# Altium PCB PlataMagnitometra.PcbDoc
Units mm, origin at the board's own origin, x right, y up, seen from the top; angles counter-clockwise.
Board outline 60 x 50 mm, 2 copper layers (Top Layer, Bottom Layer); 53 components, 38 nets, 243 pads, 25 vias.
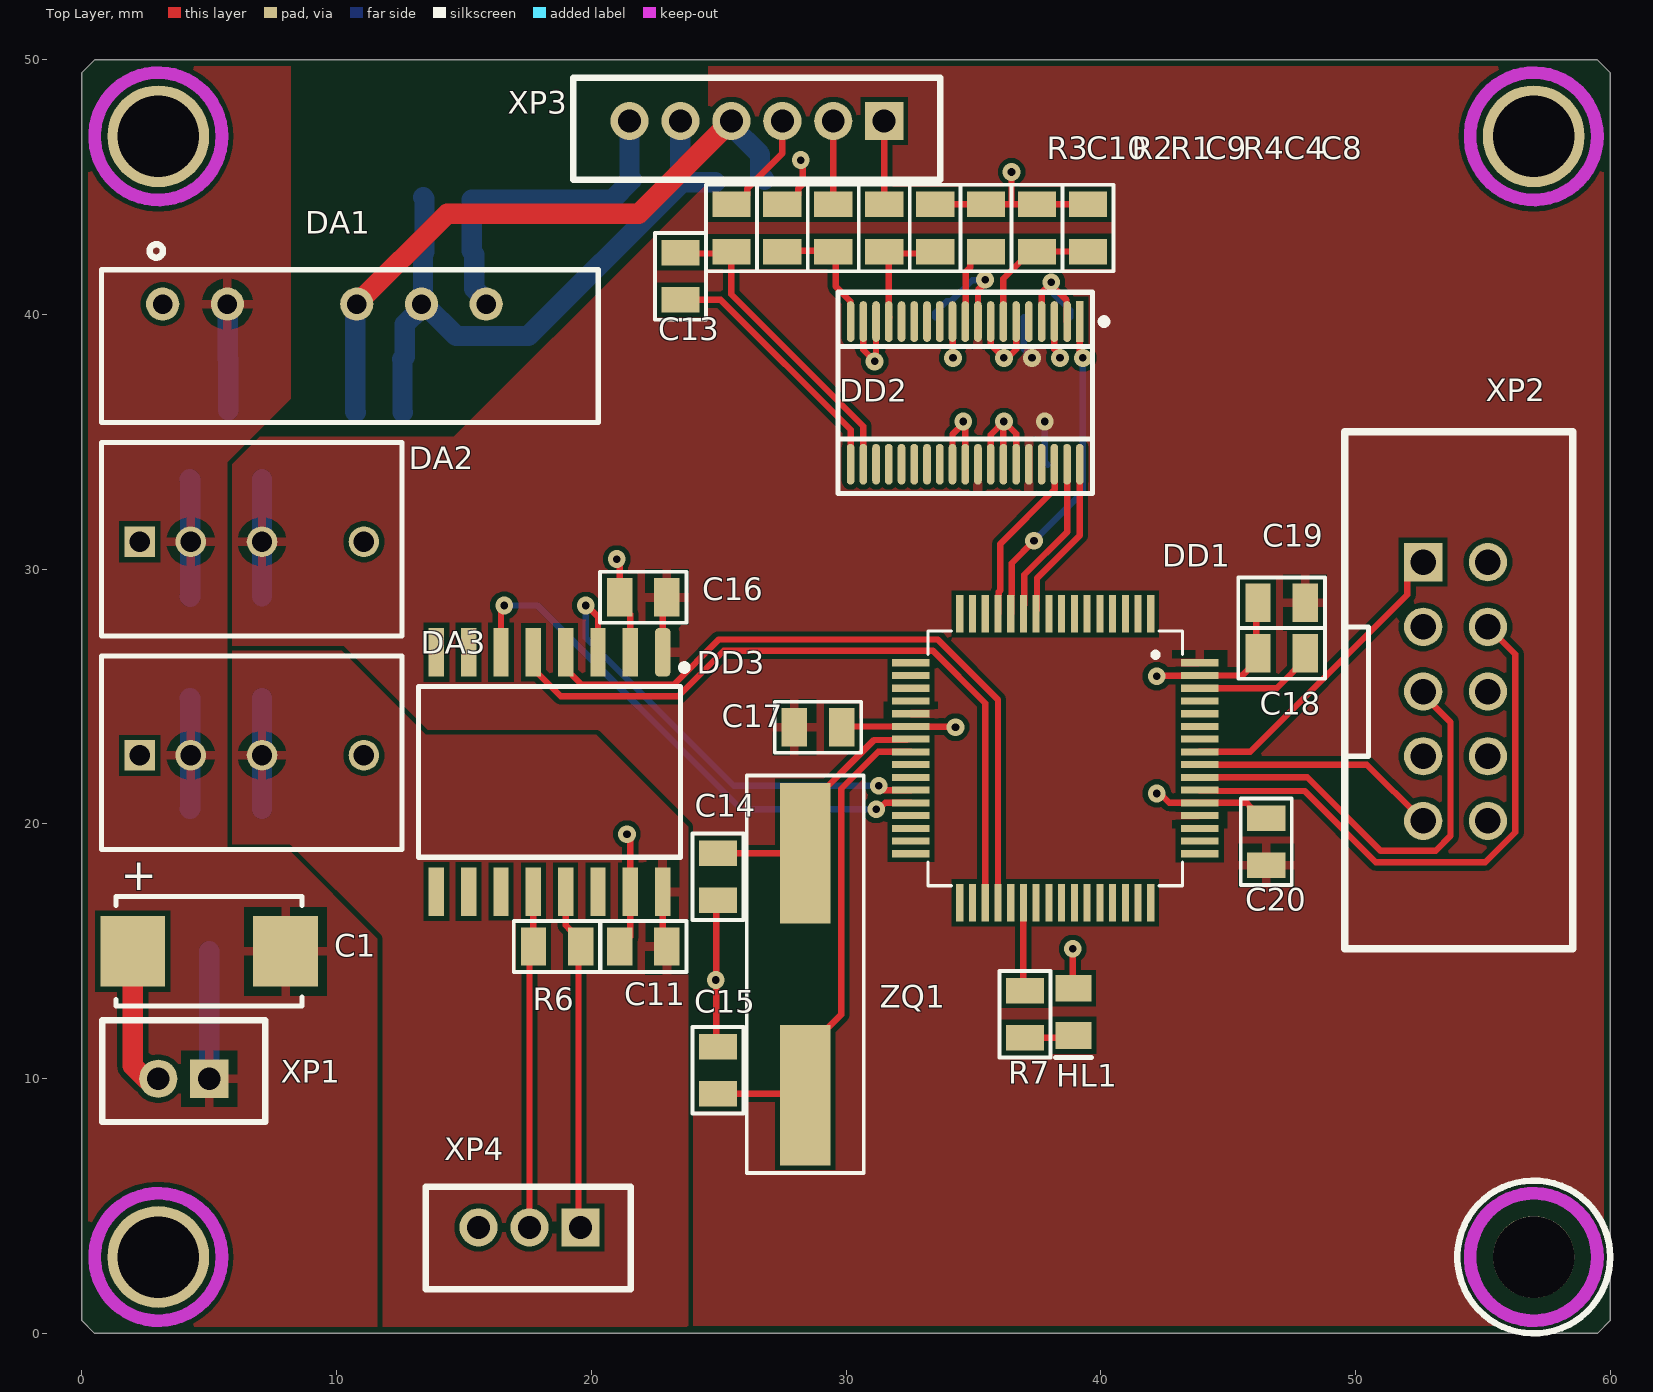
[diagram p0: Top Layer view]
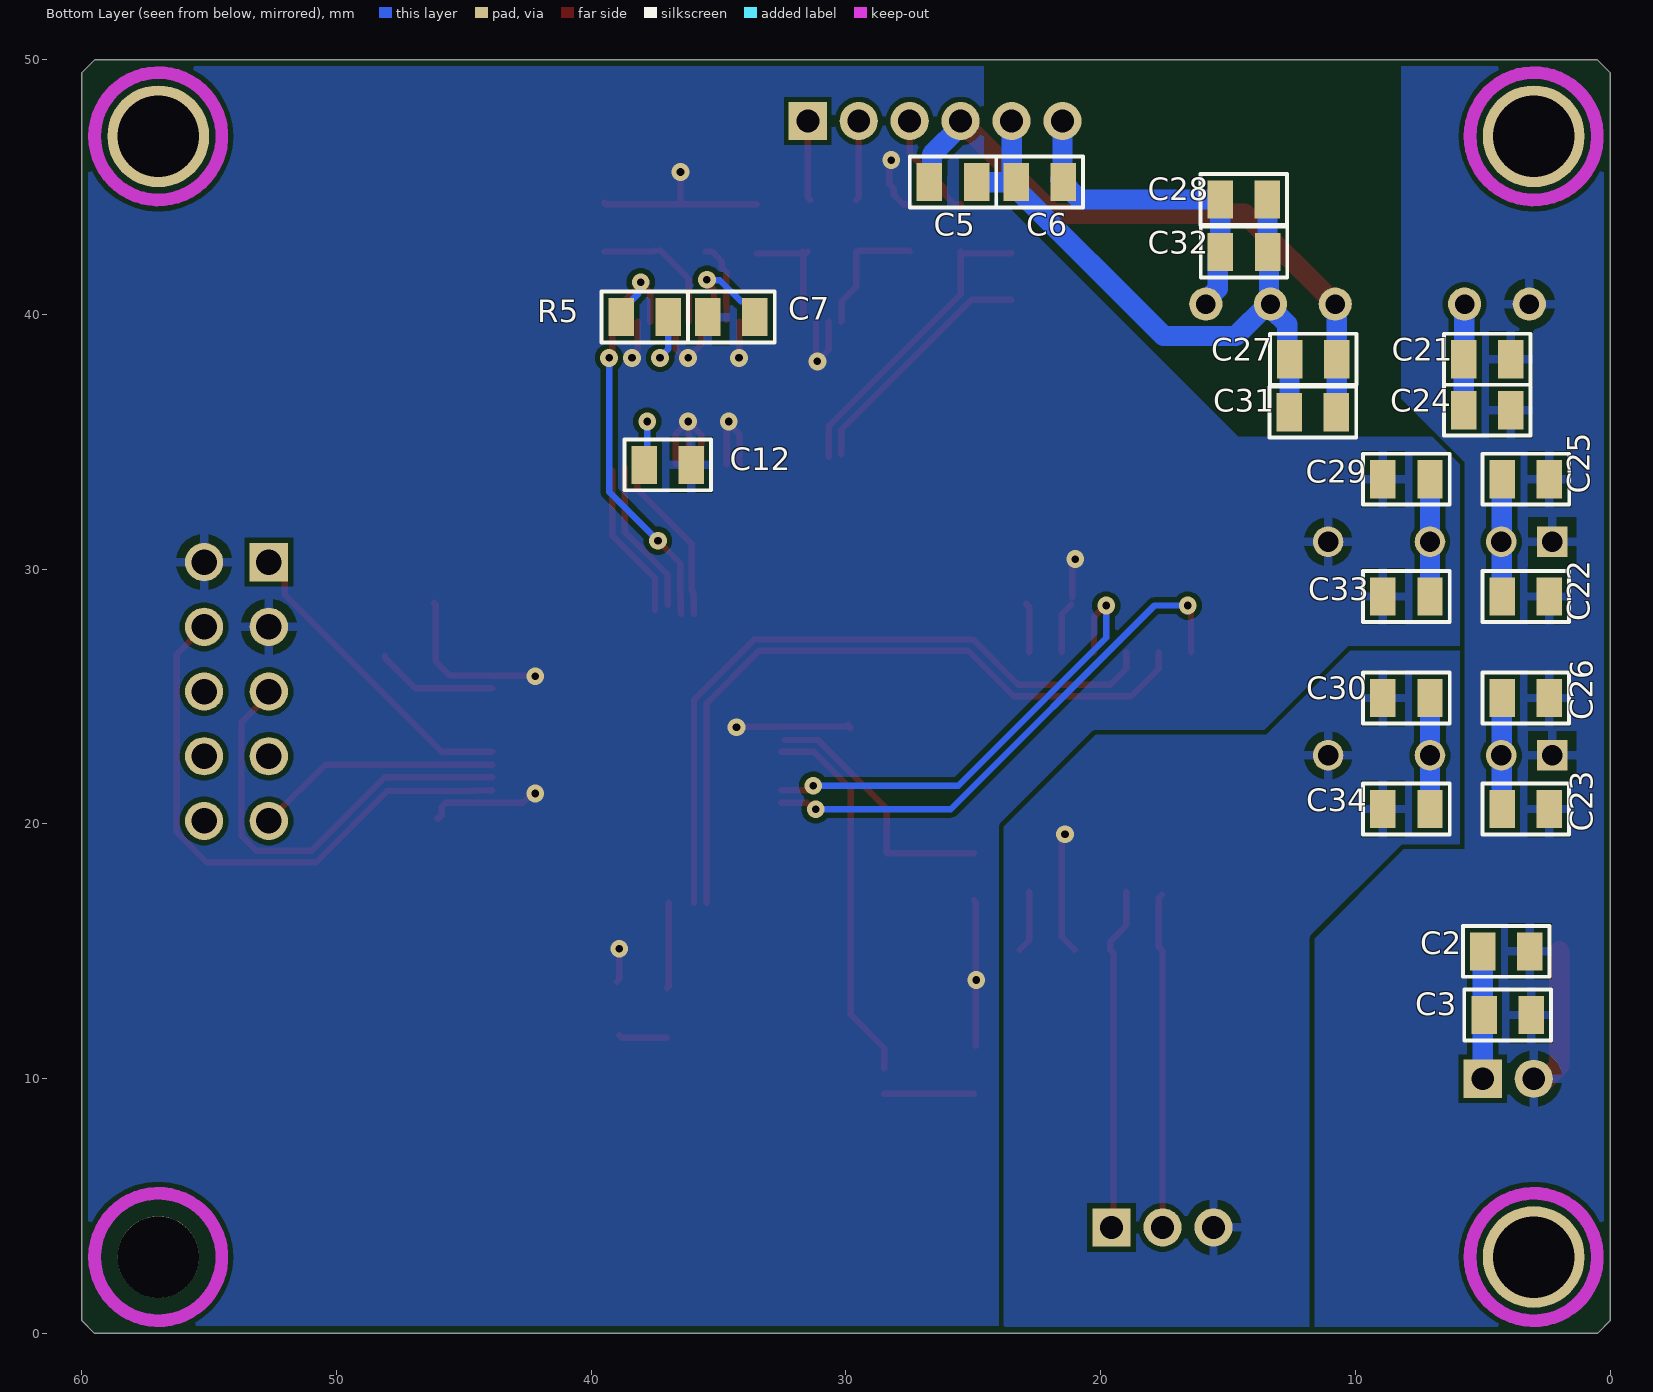
[diagram p1: Bottom Layer view, seen from below]
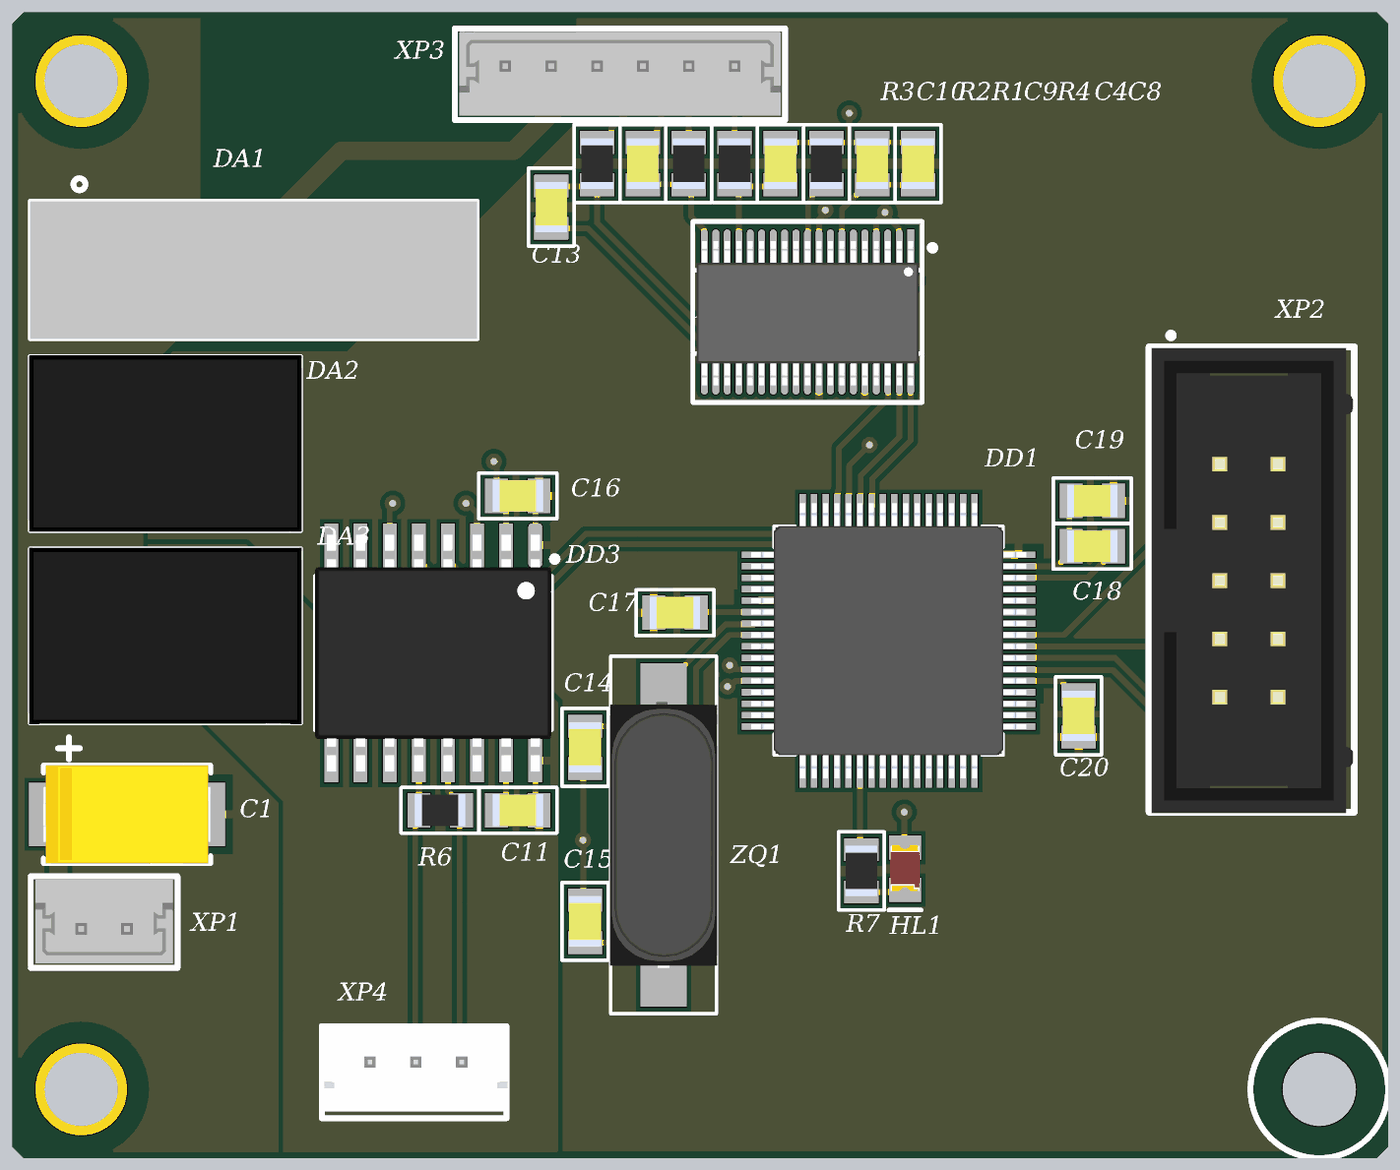
[diagram p2: 3D render of the assembled board from above, using the file's embedded part models]
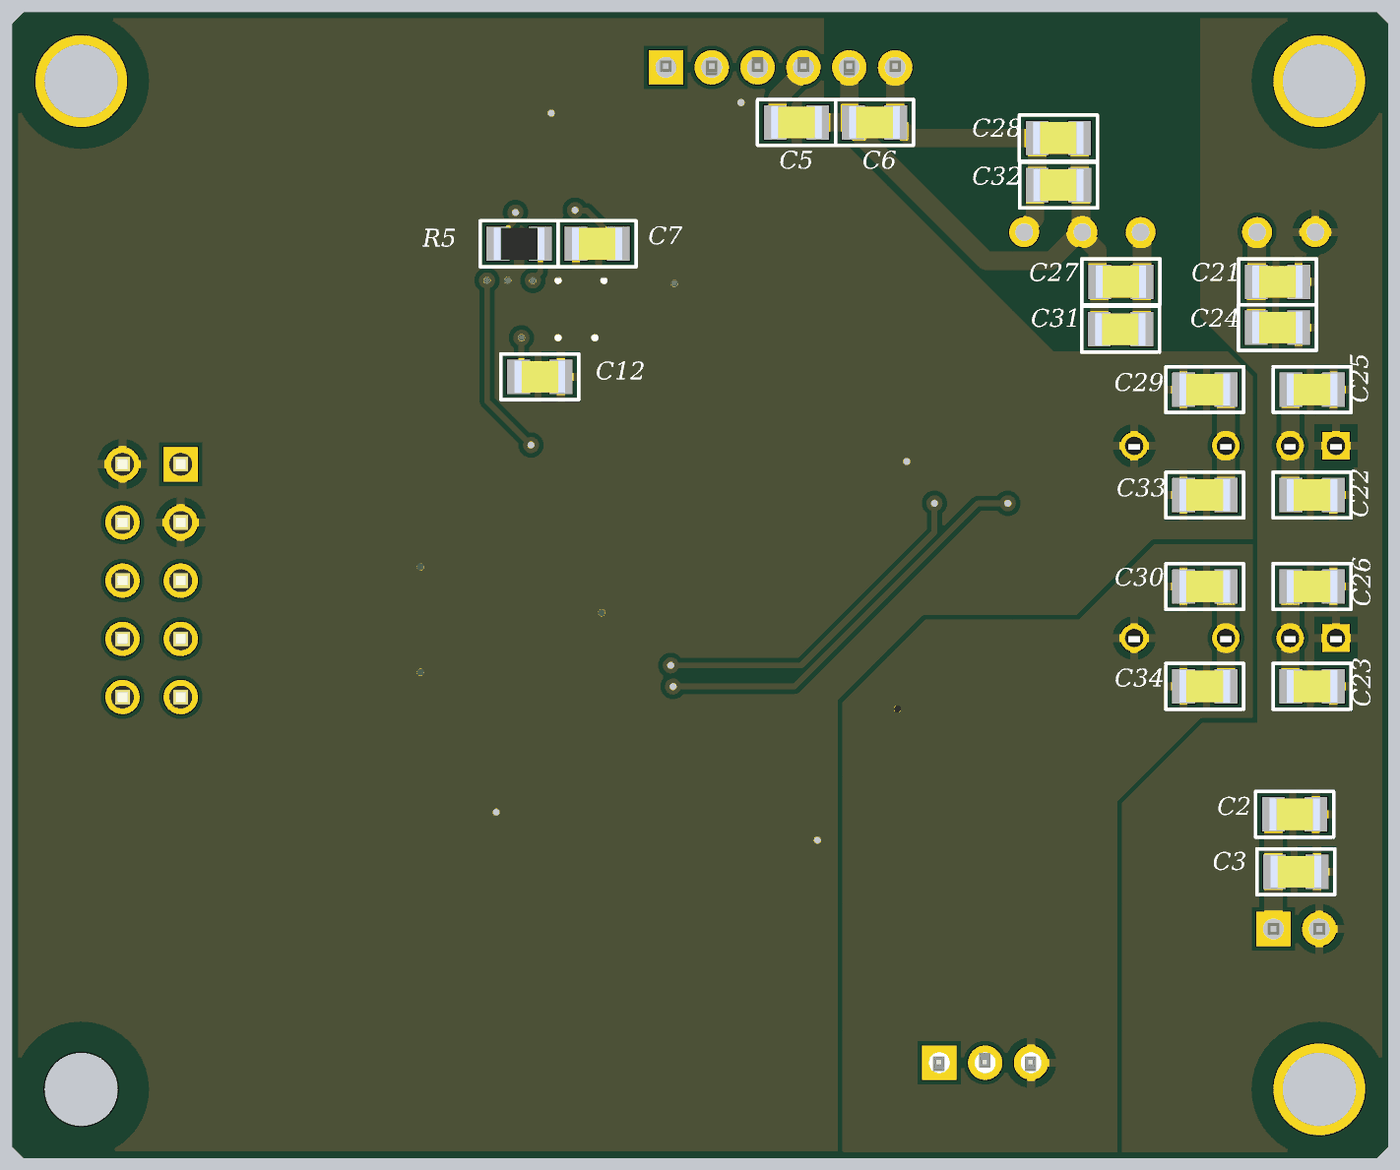
[diagram p3: 3D render of the assembled board from below, using the file's embedded part models]

## Layer stack, top to bottom
Top Solder: solder mask 0.0102, Solder Resist, Dk 3.5
Top Layer: signal copper 0.0356
Dielectric 1: dielectric 0.32, FR-4, Dk 4.8
Bottom Layer: signal copper 0.0356
Bottom Solder: solder mask 0.0102, Solder Resist, Dk 3.5

## Board outline
0,0.5 0,49.5 0.5,50 59.5,50 60,49.5 60,0.5 59.5,0 0.5,0

## Design rules (kind name [scope] priority, off if disabled: settings)
AcuteAngle [All] p1: minimum=3.50000000000000E+0001 checktracksonly=FALSE
BoardOutlineClearance "BoardOutlineClearance 1" [All] p1: gap=0.25 ignorepadtopadclearanceinfootprint=FALSE except(0: Arc-SplitContinuation Track-SplitContinuation SMDPad-SplitContinuation THPad-SplitContinuation Via-SplitContinuation Fill-SplitContinuation Poly-SplitContinuation Region-SplitContinuation Text-SplitContinuation) // Milling
BoardOutlineClearance "BoardOutlineClearance 2" [All] p2: gap=0.4 ignorepadtopadclearanceinfootprint=FALSE except(0: Arc-SplitContinuation Track-SplitContinuation SMDPad-SplitContinuation THPad-SplitContinuation Via-SplitContinuation Fill-SplitContinuation Poly-SplitContinuation Region-SplitContinuation Text-SplitContinuation) // V-Cut
Clearance "Clearance-1 1 Oz" [All] p1: gap=0.2 ignorepadtopadclearanceinfootprint=FALSE except(0.25: Arc-Hole Track-Hole SMDPad-Hole THPad-Hole Via-Hole Fill-Hole Poly-Hole Region-Hole Text-Hole) // Standart
Clearance "Clearance-2 1 Oz" [All] p2: gap=0.15 ignorepadtopadclearanceinfootprint=FALSE except(0.2: Arc-Fill Arc-Poly Track-Fill Track-Poly SMDPad-Fill SMDPad-Poly THPad-Fill THPad-Poly Via-Fill Via-Poly Fill-Fill Fill-Poly Poly-Poly; 0.25: Arc-Hole Track-Hole SMDPad-Hole THPad-Hole Via-Hole Fill-Hole Poly-Hole Region-Hole Text-Hole) // Advance
DiffPairsRouting "DiffPairsRouting 1 Oz" [All] p1: maxlimit=0.254 minlimit=0.2 mostfreqgap=0.254 toplayer_minwidth=0.2 toplayer_maxwidth=0.381 toplayer_prefwidth=0.381 bottomlayer_minwidth=0.2 bottomlayer_maxwidth=0.381 bottomlayer_prefwidth=0.381 maxuncoupledlength=12.7
DiffPairsRouting "DiffPairsRouting 1/2 Oz" [All] p2: maxlimit=0.254 minlimit=0.1 mostfreqgap=0.254 toplayer_minwidth=0.1 toplayer_maxwidth=0.381 toplayer_prefwidth=0.381 bottomlayer_minwidth=0.1 bottomlayer_maxwidth=0.381 bottomlayer_prefwidth=0.381 maxuncoupledlength=12.7
HoleSize "Minimum HoleSize" [IsPad] p1: absolutevalues=TRUE maxlimit=5.9 minlimit=0.6 maxpercent=80.000 minpercent=20.000
HoleSize "Minimum HoleSize VIA 1" [IsVia] p2: absolutevalues=TRUE maxlimit=5.9 minlimit=0.3 maxpercent=80.000 minpercent=20.000 // Standart
HoleSize "Minimum HoleSize VIA 2" [IsVia] p3: absolutevalues=TRUE maxlimit=5.9 minlimit=0.2 maxpercent=80.000 minpercent=20.000 // Advance
HoleToHoleClearance Hole2HoleClearance [All] p1: gap=0.25 allowstackedmicrovias=FALSE
MinimumAnnularRing "Minimum AR VIA Standart" [IsVia] p1: minimumring=0.15
MinimumAnnularRing "Minimum AR PAD Standart" [IsPAD] p2: minimumring=0.2
MinimumAnnularRing "Minimum AR VIA Advance" [IsVia] p3: minimumring=0.1
MinimumAnnularRing "Minimum AR PAD Advance" [IsPAD] p4: minimumring=0.15
MinimumSolderMaskSliver "SolderMask Bridge Standart" [All] p1: minsoldermaskwidth=0.1 // All Masks
MinimumSolderMaskSliver "SolderMask Bridge Advance" [All] p2: minsoldermaskwidth=0.1 // Mask LDI
PlaneClearance "PlaneClearance 3 Oz" [All] p1: clearance=0.35
PlaneClearance "PlaneClearance 2 Oz" [All] p2: clearance=0.3
PlaneClearance "PlaneClearance 1 Oz" [All] p3: clearance=0.2
PlaneClearance "PlaneClearance-1 1/2 Oz" [All] p4: clearance=0.2 // Standart
PlaneClearance "PlaneClearance-2 1/2 Oz" [All] p5: clearance=0.15 // Advance
PlaneConnect "TermalConnect 3 Oz" [All] p1: planeconnectstyle=Relief reliefexpansion=0.2 reliefentries=4 reliefconductorwidth=0.35 reliefairgap=0.35 // Standart
PlaneConnect "TermalConnect 2 Oz" [All] p2: planeconnectstyle=Relief reliefexpansion=0.2 reliefentries=4 reliefconductorwidth=0.3 reliefairgap=0.3 // Standart
PlaneConnect "TermalConnect-1 1 Oz" [All] p3: planeconnectstyle=Relief reliefexpansion=0.2 reliefentries=4 reliefconductorwidth=0.2 reliefairgap=0.2 // Standart
PlaneConnect "TermalConnect-2 1 Oz" [All] p4: pad.planeconnectstyle=Relief pad.reliefexpansion=0.15 pad.reliefentries=4 pad.reliefconductorwidth=0.2 pad.reliefairgap=0.2 via.planeconnectstyle=Direct via.reliefexpansion=0.15 via.reliefentries=4 via.reliefconductorwidth=0.15 via.reliefairgap=0.15 // Advance
PlaneConnect "TermalConnect-1 1/2 Oz" [All] p5: planeconnectstyle=Relief reliefexpansion=0.2 reliefentries=4 reliefconductorwidth=0.2 reliefairgap=0.2 // Standart
PlaneConnect "TermalConnect-2 1/2 Oz" [All] p6: pad.planeconnectstyle=Relief pad.reliefexpansion=0.15 pad.reliefentries=4 pad.reliefconductorwidth=0.15 pad.reliefairgap=0.15 via.planeconnectstyle=Direct via.reliefexpansion=0.15 via.reliefentries=4 via.reliefconductorwidth=0.15 via.reliefairgap=0.15 // Advance
PolygonConnect "PolygonConnect 3 Oz" [All] p1: thpad.connectstyle=Relief thpad.reliefconductorwidth=0.35 thpad.reliefentries=4 thpad.polygonreliefangle="90 Angle" thpad.airgapwidth=0.35 smdpad.connectstyle=Relief smdpad.reliefconductorwidth=0.35 smdpad.reliefentries=4 smdpad.polygonreliefangle="90 Angle" smdpad.airgapwidth=0.35 via.connectstyle=Direct via.reliefconductorwidth=0.254 via.reliefentries=4 via.polygonreliefangle="90 Angle" via.airgapwidth=0.254
PolygonConnect "PolygonConnect 2 Oz" [All] p2: thpad.connectstyle=Relief thpad.reliefconductorwidth=0.3 thpad.reliefentries=4 thpad.polygonreliefangle="90 Angle" thpad.airgapwidth=0.3 smdpad.connectstyle=Relief smdpad.reliefconductorwidth=0.3 smdpad.reliefentries=4 smdpad.polygonreliefangle="90 Angle" smdpad.airgapwidth=0.3 via.connectstyle=Direct via.reliefconductorwidth=0.254 via.reliefentries=4 via.polygonreliefangle="90 Angle" via.airgapwidth=0.254
PolygonConnect "PolygonConnect-1 1 Oz" [All] p3: thpad.connectstyle=Relief thpad.reliefconductorwidth=0.2 thpad.reliefentries=4 thpad.polygonreliefangle="90 Angle" thpad.airgapwidth=0.2 smdpad.connectstyle=Relief smdpad.reliefconductorwidth=0.2 smdpad.reliefentries=4 smdpad.polygonreliefangle="90 Angle" smdpad.airgapwidth=0.2 via.connectstyle=Direct via.reliefconductorwidth=0.254 via.reliefentries=4 via.polygonreliefangle="90 Angle" via.airgapwidth=0.254 // Standart
PolygonConnect "PolygonConnect-2 1 Oz" [All] p4: thpad.connectstyle=Relief thpad.reliefconductorwidth=0.15 thpad.reliefentries=4 thpad.polygonreliefangle="90 Angle" thpad.airgapwidth=0.15 smdpad.connectstyle=Relief smdpad.reliefconductorwidth=0.15 smdpad.reliefentries=4 smdpad.polygonreliefangle="90 Angle" smdpad.airgapwidth=0.15 via.connectstyle=Direct via.reliefconductorwidth=0.254 via.reliefentries=4 via.polygonreliefangle="90 Angle" via.airgapwidth=0.254 // Advance
PolygonConnect "PolygonConnect-1 1/2 Oz" [All] p5: thpad.connectstyle=Relief thpad.reliefconductorwidth=0.15 thpad.reliefentries=4 thpad.polygonreliefangle="90 Angle" thpad.airgapwidth=0.2 smdpad.connectstyle=Relief smdpad.reliefconductorwidth=0.2 smdpad.reliefentries=4 smdpad.polygonreliefangle="90 Angle" smdpad.airgapwidth=0.2 via.connectstyle=Direct via.reliefconductorwidth=0.254 via.reliefentries=4 via.polygonreliefangle="90 Angle" via.airgapwidth=0.254 // Standart
PolygonConnect "PolygonConnect-2 1/2 Oz" [All] p6: thpad.connectstyle=Relief thpad.reliefconductorwidth=0.125 thpad.reliefentries=4 thpad.polygonreliefangle="90 Angle" thpad.airgapwidth=0.15 smdpad.connectstyle=Relief smdpad.reliefconductorwidth=0.125 smdpad.reliefentries=4 smdpad.polygonreliefangle="90 Angle" smdpad.airgapwidth=0.15 via.connectstyle=Direct via.reliefconductorwidth=0.254 via.reliefentries=4 via.polygonreliefangle="90 Angle" via.airgapwidth=0.254 // Advance
RoutingCorners [All] p1 off: cornerstyle=45-Degree minsetback=2.54 maxsetback=2.54
RoutingVias [All] p1: holewidth=0.3 width=0.6 viastyle="Through Hole" minholewidth=0.2 minwidth=0.4 maxholewidth=5.9 maxwidth=6.4
SilkToSilkClearance Silk2SilkClearance [All] p1 off: silktosilkclearance=0.15
SilkToSolderMaskClearance Silk2SolderMaskClearance [IsPad] p1 off: minsilkscreentomaskgap=0.15 clearancetoexposedcopper=TRUE
SolderMaskExpansion SolderMaskExpansion-1 [All] p1: expansion=0.05 istentingtop=FALSE // Standart
SolderMaskExpansion "SolderMaskExpansion LDI" [All] p2: expansion=0.025 istentingtop=FALSE // Advance
UnRoutedNet [All] p1: checkbadconnections=TRUE
Width "Width 1 Oz" [All] p1: maxlimit=10 minlimit=0.15 preferedwidth=0.2 checkconnectedcopper=TRUE
Width "Width 1/2 Oz" [All] p2: maxlimit=10 minlimit=0.1 preferedwidth=0.125 checkconnectedcopper=TRUE
20 further rules are at their usual default settings.

## Components (designator, comment, footprint, x,y, rotation, side; value= is the part's Value field where it differs from the comment)
C1 "Конденсатор электрол. 10 В 100 мкФ Ом, ±10%, TANT CAP D" "TANT CAP D" 4.998,15 r0 top value="100 мкФ"
C2 "Конденсатор керамич. 50 В 0.1 мкФ Ом, ±10%, X7R SMD 0805" CAP0805 4.075,15 r180 bottom value="0.1 мкФ"
C3 "Конденсатор керамич. 50 В 10 мкФ Ом, ±10%, X5R SMD 0805" CAP0805 4.025,12.5 r180 bottom value="10 мкФ"
C4 "Конденсатор керамич. 50 В 0.1 мкФ Ом, ±10%, X7R SMD 0805" CAP0805 37.5,43.4 r90 top value="0.1 мкФ"
C5 "Конденсатор керамич. 50 В 10 мкФ Ом, ±10%, X5R SMD 0805" CAP0805 25.8,45.2 r180 bottom value="10 мкФ"
C6 "Конденсатор керамич. 50 В 10 мкФ Ом, ±10%, X5R SMD 0805" CAP0805 22.4,45.2 r180 bottom value="10 мкФ"
C7 "Конденсатор керамич. 50 В 0.1 мкФ Ом, ±10%, X7R SMD 0805" CAP0805 34.5,39.9 r0 bottom value="0.1 мкФ"
C8 "Конденсатор керамич. 50 В 0.1 мкФ Ом, ±10%, X7R SMD 0805" CAP0805 39.5,43.4 r90 top value="0.1 мкФ"
C9 "Конденсатор керамич. 50 В 0.1 мкФ Ом, ±10%, X7R SMD 0805" CAP0805 33.5,43.4 r270 top value="0.1 мкФ"
C10 "Конденсатор керамич. 50 В 0.1 мкФ Ом, ±10%, X7R SMD 0805" CAP0805 27.5,43.4 r270 top value="0.1 мкФ"
C11 "Конденсатор керамич. 50 В 0.1 мкФ Ом, ±10%, X7R SMD 0805" CAP0805 22.042,15.186 r0 top value="0.1 мкФ"
C12 "Конденсатор керамич. 50 В 0.1 мкФ Ом, ±10%, X7R SMD 0805" CAP0805 37,34.1 r0 bottom value="0.1 мкФ"
C13 "Конденсатор керамич. 50 В 0.1 мкФ Ом, ±10%, X7R SMD 0805" CAP0805 23.5,41.5 r90 top value="0.1 мкФ"
C14 "Конденсатор керамич. 50 В 0.3 пФ Ом, +0.25pF, X5R SMD 0805" CAP0805 24.975,17.925 r270 top value="0.3 пФ"
C15 "Конденсатор керамич. 50 В 0.3 пФ Ом, +0.25pF, X5R SMD 0805" CAP0805 24.975,10.331 r90 top value="0.3 пФ"
C16 "Конденсатор керамич. 50 В 0.1 мкФ Ом, ±10%, X7R SMD 0805" CAP0805 22.042,28.902 r180 top value="0.1 мкФ"
C17 "Конденсатор керамич. 50 В 0.1 мкФ Ом, ±10%, X7R SMD 0805" CAP0805 28.9,23.8 r180 top value="0.1 мкФ"
C18 "Конденсатор керамич. 50 В 0.1 мкФ Ом, ±10%, X7R SMD 0805" CAP0805 47.1,26.7 r0 top value="0.1 мкФ"
C19 "Конденсатор керамич. 50 В 0.1 мкФ Ом, ±10%, X7R SMD 0805" CAP0805 47.1,28.684 r180 top value="0.1 мкФ"
C20 "Конденсатор керамич. 50 В 0.1 мкФ Ом, ±10%, X7R SMD 0805" CAP0805 46.5,19.3 r270 top value="0.1 мкФ"
C21 "Конденсатор керамич. 50 В 0.1 мкФ Ом, ±10%, X7R SMD 0805" CAP0805 4.821,38.245 r180 bottom value="0.1 мкФ"
C22 "Конденсатор керамич. 50 В 0.1 мкФ Ом, ±10%, X7R SMD 0805" CAP0805 3.316,28.933 r180 bottom value="0.1 мкФ"
C23 "Конденсатор керамич. 50 В 0.1 мкФ Ом, ±10%, X7R SMD 0805" CAP0805 3.316,20.588 r180 bottom value="0.1 мкФ"
C24 "Конденсатор керамич. 50 В 10 мкФ Ом, ±10%, X5R SMD 0805" CAP0805 4.828,36.246 r180 bottom value="10 мкФ"
C25 "Конденсатор керамич. 50 В 10 мкФ Ом, ±10%, X5R SMD 0805" CAP0805 3.309,33.538 r180 bottom value="10 мкФ"
C26 "Конденсатор керамич. 50 В 10 мкФ Ом, ±10%, X5R SMD 0805" CAP0805 3.316,24.946 r180 bottom value="10 мкФ"
C27 "Конденсатор керамич. 50 В 0.1 мкФ Ом, ±10%, X7R SMD 0805" CAP0805 11.655,38.245 r0 bottom value="0.1 мкФ"
C28 "Конденсатор керамич. 50 В 0.1 мкФ Ом, ±10%, X7R SMD 0805" CAP0805 14.383,44.517 r0 bottom value="0.1 мкФ"
C29 "Конденсатор керамич. 50 В 0.1 мкФ Ом, ±10%, X7R SMD 0805" CAP0805 7.997,33.538 r0 bottom value="0.1 мкФ"
C30 "Конденсатор керамич. 50 В 0.1 мкФ Ом, ±10%, X7R SMD 0805" CAP0805 7.997,24.946 r0 bottom value="0.1 мкФ"
C31 "Конденсатор керамич. 50 В 10 мкФ Ом, ±10%, X5R SMD 0805" CAP0805 11.67,36.168 r0 bottom value="10 мкФ"
C32 "Конденсатор керамич. 50 В 10 мкФ Ом, ±10%, X5R SMD 0805" CAP0805 14.375,42.459 r0 bottom value="10 мкФ"
C33 "Конденсатор керамич. 50 В 10 мкФ Ом, ±10%, X5R SMD 0805" CAP0805 7.997,28.933 r0 bottom value="10 мкФ"
C34 "Конденсатор керамич. 50 В 10 мкФ Ом, ±10%, X5R SMD 0805" CAP0805 7.997,20.588 r0 bottom value="10 мкФ"
DA1 "DC/DC, 15Вт, Uвх: 18-36В, Uвых: 15ВDC, Iвых: 500мА" TBA12411E 3.173,40.41 r0 top
DA2 "DC/DC 1Вт, Uвх 18-36В, 5ВDC, Iвых 200мА" TRN1 2.273,31.085 r0 top
DA3 "DC/DC 1Вт, Uвх 18-36В, 5ВDC, Iвых 200мА" TRN1 2.273,22.694 r0 top
DD1 "ATMEGA128" TQFP64 41.966,28.25 r270 top
DD2 "ADS8684IDBT" 38TSSOP 39.18,39.725 r270 top
DD3 "ADM2483BRW" "SOIC-16 WIDE" 18.359,22.044 r270 top
HL1 "Светодиод SMD KP-2012" "LED0805 Red" 38.933,13.626 r270 top
R1 "Чип резистор 0.125Вт 470 Ом, 5%,  SMD SMD 0805" RES0805 31.5,43.4 r90 top value=470
R2 "Чип резистор 0.125Вт 470 Ом, 5%,  SMD SMD 0805" RES0805 29.5,43.4 r90 top value=470
R3 "Чип резистор 0.125Вт 470 Ом, 5%,  SMD SMD 0805" RES0805 25.5,43.4 r90 top value=470
R4 "Чип резистор 0.125Вт 1k Ом, 5%,  SMD SMD 0805" RES0805 35.5,43.4 r90 top value=1k
R5 "Чип резистор 0.125Вт 1k Ом, 5%,  SMD SMD 0805" RES0805 37.9,39.9 r180 bottom value=1k
R6 "Чип резистор 0.125Вт 470 Ом, 5%,  SMD SMD 0805" RES0805 18.656,15.186 r0 top value=470
R7 "Чип резистор 0.125Вт 150 Ом, 5%,  SMD SMD 0805" RES0805 37.028,12.535 r90 top value=150
XP1 "Коннектор JST Corporation, 2 мм, 1 ряд, 2 контактa" 2pinMicroLatch 5,10 r180 top value="2 Pin Connector"
XP2 "JTAG (IDC-10)" IDC10 53.93,25.2 r0 top
XP3 "Коннектор Micro-Latch, Signal, 2 мм, 1 ряд, 6 контактов" 6pinMicroLatch 31.5,47.6 r180 top value=MolexMicroLatch
XP4 "Коннектор Micro-Latch, Signal, 2 мм, 1 ряд, 3 контактa" 3pinMicroLatch 19.572,4.164 r180 top value=MolexMicroLatch
ZQ1 "Резонатор кварцевый низкопрофильный 9.216 МГц SMT" HC49S4HSMD 28.4,14.1 r90 top value="9,216 МГц"

## Footprints (in the part's own frame and the unit in brackets; to place one, negate y for a bottom-side part, rotate by r counter-clockwise, add the part's x,y. Pads: shape width x height; smd on the part's side, far side on the other; paste and mask are expansions set on the pad)
2pinMicroLatch [mm] "Molex 2mm pitch wire to board"
  rect 1.5x1.5 hole 0.9: 1(0,0)
  round 1.5 hole 0.9: 2(2,0)
  silkscreen extent -2.2,-2.3 4.2,1.7, body extent -2,-2.15 4,1.5, height 5.55
3pinMicroLatch [mm] "Molex 2mm pitch wire to board"
  rect 1.5x1.5 hole 0.9: 1(0,0)
  round 1.5 hole 0.9: 2(2,0) 3(4,0)
  silkscreen extent -1.97,-1.6 6.07,2.42, body extent -2.02,-1.53 5.98,2.12, height 5.55
6pinMicroLatch [mm] "Molex 2mm pitch wire to board"
  rect 1.5x1.5 hole 0.9: 1(0,0)
  round 1.5 hole 0.9: 2(2,0) 3(4,0) 4(6,0) 5(8,0) 6(10,0)
  silkscreen extent -2.2,-1.7 12.2,2.3, body extent -2,-1.55 12,2.1, height 5.55
38TSSOP [mm]
  rect 1.6x0.3 smd: 1(0,0)
  oval 1.6x0.3 smd: 2(0,-0.5) 3(0,-1) 4(0,-1.5) 5(0,-2) 6(0,-2.5) 7(0,-3) 8(0,-3.5) 9(0,-4) 10(0,-4.5) 11(0,-5) 12(0,-5.5) 13(0,-6) 14(0,-6.5) 15(0,-7) 16(0,-7.5) 17(0,-8) 18(0,-8.5) 19(0,-9) 20(5.6,-9) 21(5.6,-8.5) 22(5.6,-8) 23(5.6,-7.5) 24(5.6,-7) 25(5.6,-6.5) 26(5.6,-6) 27(5.6,-5.5) 28(5.6,-5) 29(5.6,-4.5) 30(5.6,-4) 31(5.6,-3.5) 32(5.6,-3) 33(5.6,-2.5) 34(5.6,-2) 35(5.6,-1.5) 36(5.6,-1) 37(5.6,-0.5) 38(5.6,0)
  silkscreen extent -1.15,-9.5 6.75,1.08, body extent -0.3,-9.35 6,0.35, height 1
CAP0805 [mm] "Chip Capacitor, 2-Leads, Body 2,00x1,20mm, IPC Medium Density"
  rect 1x1.5 smd: 1(-0.925,0) 2(0.925,0)
  silkscreen extent -1.7,-1 1.7,1, body extent -1.1,-0.7 1.1,0.7, height 0.6
HC49S4HSMD [mm] "HC49S4HSMD"
  rect 5.5x2 smd: 1(-4.75,0) 2(4.75,0)
  silkscreen extent -7.8,-2.3 7.8,2.3, body extent -5.8,-2.35 5.81,2.35, height 4.2
IDC10 [mm]
  rect 1.5x1.5 hole 1: 1(-1.27,5.08)
  round 1.5 hole 1: 2(-1.27,2.54) 3(-1.27,0) 4(-1.27,-2.54) 5(-1.27,-5.08) 6(1.27,-5.08) 7(1.27,-2.54) 8(1.27,0) 9(1.27,2.54) 10(1.27,5.08)
  round 0.5 on Top Overlay: ""(-3.4,10.7)
  silkscreen extent -4.35,-10.1 4.6,10.2, body extent -4.25,-10.15 4.55,10.15, height 9.3
"LED0805 Red" [mm] "Chip Led, 2-Leads, Body 2,00x1,20mm, IPC Medium Density"
  rect 1.05x1.4 smd: 1(0.075,0) 2(1.925,0)
  silkscreen extent 2.8,-0.7 2.8,0.7, body extent -0.03,-0.63 1.97,0.63, height 0.8
RES0805 [mm] "Chip Resistor, 2-Leads, Body 2,00x1,20mm, IPC Medium Density"
  rect 1x1.5 smd: 1(-0.925,0) 2(0.925,0)
  silkscreen extent -1.7,-1 1.7,1, body extent -1.1,-0.7 1.1,0.7, height 0.6
"SOIC-16 WIDE" [mm] "SOIC, 16-Leads, Body 10.30x7.50mm, Pitch 1.27mm, IPC Medium Density"
  rrect50% 1.9x0.6 smd: 1(-4.7,4.445)
  rect 1.9x0.6 smd: 2(-4.7,3.175) 3(-4.7,1.905) 4(-4.7,0.635) 5(-4.7,-0.635) 6(-4.7,-1.905) 7(-4.7,-3.175) 8(-4.7,-4.445) 9(4.7,-4.445) 10(4.7,-3.175) 11(4.7,-1.905) 12(4.7,-0.635) 13(4.7,0.635) 14(4.7,1.905) 15(4.7,3.175) 16(4.7,4.445)
  silkscreen extent -4.22,-5.15 3.35,5.42, body extent -5.16,-5.15 5.16,5.15, height 2.65
"TANT CAP D" [mm] "Molded Capacitor, 2-Leads, Body 6,00x3,20mm, IPC Medium Density"
  rect 2.55x2.77 smd: 1(-3,0) 2(3,0)
  silkscreen extent -3.65,-2.15 3.65,2.15, body extent -3.65,-2.15 3.65,2.15, height 2.81
TBA12411E [mm]
  round 1.303 hole 0.76: 1(0,0) 2(2.54,0) 4(7.62,0) 5(10.16,0) 6(12.7,0)
  silkscreen extent -2.4,-4.65 17.1,2.35, body extent -2.4,-4.65 17.1,1.35, height 9.91
TQFP64 [mm]
  rect 1.47x0.28 smd: 1(0,0) 2(0,-0.5) 3(0,-1) 4(0,-1.5) 5(0,-2) 6(0,-2.5) 7(0,-3) 8(0,-3.5) 9(0,-4) 10(0,-4.5) 11(0,-5) 12(0,-5.5) 13(0,-6) 14(0,-6.5) 15(0,-7) 16(0,-7.5) 33(11.34,-7.5) 34(11.34,-7) 35(11.34,-6.5) 36(11.34,-6) 37(11.34,-5.5) 38(11.34,-5) 39(11.34,-4.5) 40(11.34,-4) 41(11.34,-3.5) 42(11.34,-3) 43(11.34,-2.5) 44(11.34,-2) 45(11.34,-1.5) 46(11.34,-1) 47(11.34,-0.5) 48(11.34,0)
  rect 0.28x1.47 smd: 17(1.92,-9.42) 18(2.42,-9.42) 19(2.92,-9.42) 20(3.42,-9.42) 21(3.92,-9.42) 22(4.42,-9.42) 23(4.92,-9.42) 24(5.42,-9.42) 25(5.92,-9.42) 26(6.42,-9.42) 27(6.92,-9.42) 28(7.42,-9.42) 29(7.92,-9.42) 30(8.42,-9.42) 31(8.92,-9.42) 32(9.42,-9.42) 49(9.42,1.92) 50(8.92,1.92) 51(8.42,1.92) 52(7.92,1.92) 53(7.42,1.92) 54(6.92,1.92) 55(6.42,1.92) 56(5.92,1.92) 57(5.42,1.92) 58(4.92,1.92) 59(4.42,1.92) 60(3.92,1.92) 61(3.42,1.92) 62(2.92,1.92) 63(2.42,1.92) 64(1.92,1.92)
  silkscreen extent 0.67,-8.75 10.67,1.25, body extent -0.33,-9.75 11.67,2.25, height 1.18
TRN1 [mm] "DC/DC, 1W"
  rect 1.2x1.2 hole 0.8: 1(0,0)
  round 1.2 hole 0.8: 2(2,0) 3(4.8,0) 5(8.8,0)
  silkscreen extent -1.5,-3.7 10.3,3.9, body extent -1.55,-3.75 10.35,3.95, height 11

## Part data
C1: library part "POL CAP", "Конденсатор электролитический танталовый", Manufacturer=Китай, PowerVoltage="10 В", Accuracy=±10%, CompType="Конденсатор электрол.", Foot="TANT CAP D", ProductCode=TECAP100/10VD10
C2 C4 C7 C8 C9 C10 C11 C12 C13 C16 C17 C18 C19 C20 C21 C22 C23 C27 C28 C29 C30: library part Capacitor, "Конденсатор керамич. SMD", Manufacturer="Murata Electronics", PowerVoltage="50 В", Temperature=X7R, Accuracy=±10%, CompType="Конденсатор керамич.", Foot=0805, ProductCode=GRM21BR71H104K
C3 C5 C6 C24 C25 C26 C31 C32 C33 C34: library part Capacitor, "Конденсатор керамич. SMD", Manufacturer="Murata Electronics", PowerVoltage="50 В", Temperature=X5R, Accuracy=±10%, CompType="Конденсатор керамич.", Foot=0805, ProductCode=GRM21BR61A106KE19B
C14 C15: library part Capacitor, "Конденсатор керамич. SMD", Manufacturer=Yageo, PowerVoltage="50 В", Temperature=X5R, Accuracy=+0.25pF, CompType="Конденсатор керамич.", Foot=0805, ProductCode=CC0805CRNPO9BN3R0
DA1: library part "TBA 1 - double", "DC/DC, 15Вт, Uвх: 18-36В, Uвых: 15ВDC, Iвых: 33мА", Manufacturer=TracoPower, Model="TBA 1-2423E", ProductCode=TBA1-2423E
DA2 DA3: library part "TRN 1 - single", Manufacturer=TracoPower, Model=TRN1-2411, ProductCode=TRN1-2411
DD1: library part ATmega128, Manufacturer="Microchip Technology", Model=ATMEGA128-16AU, ProductCode=ATMEGA128-16AU
DD2: Manufacturer="Texas Instruments", Model=ADS8684IDBT, ProductCode=ADS8684IDBT
DD3: library part ADM2483, "ADM2483", Manufacturer=AnalogDevices, Model=ADM2483BRW, ProductCode=ADM2483BRWZ
HL1: library part LED, "Светодиод", CompType="Светодиод SMD KP-2012", Help="SYC - жёлт., MGC - зел., ID - красн."
R1 R2 R3 R6 R7: library part Resistor, "SMD resistor", Manufacturer=Тайвань, PowerVoltage=0.125Вт, Accuracy=5%, CompType="Чип резистор", Foot="SMD 0805"
  R1 R2 R3 R6: FullName="Чип резисторSMD 08054705%", ProductCode=RC0805JR-07470RL
  R7: FullName="Чип резисторSMD 08051505%", ProductCode=RC0805JR-07150RL
R4 R5: library part Resistor, "SMD resistor", Manufacturer=Panasonic, PowerVoltage=0.125Вт, Accuracy=5%, CompType="Чип резистор", Foot="SMD 0805", FullName="Чип резисторSMD 08051k5%", ProductCode=ERJP06J102V
XP1: library part 2PinConn, "B2B-EH-A (LF)", 1="+27 В", 2=Общий
XP2: library part 10PinConn, "10PinConnector", 1=TCK, 2=GND, 3=TD0, 4=VTref, 5=TMS, 6=nsRST, 7=Vsupply, 8=ntRST, 9=TDI, 10=GND
XP3: library part 6PinConn, 1=Ux, 2=Uy, 3=Uz, 4=VCC_m, 5=GND_m, 6=-VCC_m
XP4: library part 3PinConn, 1=RS485_B, 2=RS485_A, 3=Общий
ZQ1: library part Quartz_resonator, "Кварцевый резонатор", Manufacturer=ATMEGA128-16AU, ProductCode=ABLS-9.216MHZ-B4-T

## Free pads (board coordinates)
  round 4 hole 3.2 unplated: 0(3,3) 0(3,47) 0(57,47)
  round 3.2 hole 3.2 unplated: 0(57,3)

## Via types
v1: diameter 0.7, hole 0.3, Top Layer to Bottom Layer, tented both sides, 25 vias

## Nets (pads, with @x,y where several pads share a name; then routed paths per layer and width w, separated by ;. In a path a pad name is that pad's centre, name@x,y a point inside that pad or via, vN(x,y) a via of type N, cw(c..) or ccw(c..) an arc to the next point about the centre after c; other vN are vias at no path point)
+5В: C7.1 C12.2 C16.1 C17.2 C19.1 C20.2 C29.1 C33.1 DA2.3 DD1.21 DD1.52 DD1.64 DD2.9 DD2.30 DD2.34 DD3.1 R5.2 | length 14.5
  Top Layer w0.25: DD3.1 22.804,28.521 C16.1@22.931,28.648 ; DD2.9 35.18,40.966 35.5,41.286 v1@35.5,41.4
  Bottom Layer w0.25: C7.1@33.499,39.899 33.499,40.074 33.95,40.525 34.125,40.525 34.951,41.351 35.444,41.351 v1(35.46,41.368) ; R5.2 36.975,38.647 37.3,38.322 v1(37.3,38.3) ; v1(37.8,35.8) 37.8,34.225 C12.2
  Bottom Layer w0.8: C33.1 DA2.3@7.072,31.084 ; DA2.3@7.072,31.086 C29.1
+5В_RS: C11.2 C30.1 C34.1 DA3.3 DD3.16 | length 6.8
  Top Layer w0.25: DD3.16 22.804,15.44 C11.2@23.185,15.059
  Bottom Layer w0.8: DA3.3@7.002,22.664 7.072,22.593 C34.1 ; DA3.3@7.072,22.695 C30.1
+15В: C5.1 C27.1 C31.1 DA1.4 XP3.4 | length 24.8
  Top Layer w0.8: DA1.4@10.8,40.3 10.8,40.417 14.345,43.961 21.861,43.961 XP3.4
  Bottom Layer w0.8: C31.1 10.738,36.176 10.738,38.237 C27.1 10.73,40.178 10.829,40.277 DA1.4@10.843,40.277 ; XP3.4 25.5,47.411 26.625,46.286 26.625,45.475 C5.1@26.8,45.3
+27В: C1.2 C2.1 C3.1 C21.1 C22.1 C23.1 C24.1 C25.1 C26.1 DA1.2 DA2.2 DA3.2 XP1.1 | length 18.2
  Bottom Layer w0.8: C25.1 4.253,33.518 4.253,31.105 DA2.2 4.257,31.069 4.257,28.949 C22.1 C22.1@4.257,28.917 ; C23.1 4.257,20.605 4.257,22.678 DA3.2 4.257,22.71 4.257,24.93 C26.1 ; XP1.1 C2.1 ; DA1.2 5.729,40.394 5.729,38.262 C21.1 5.749,38.242 5.749,36.25 C24.1
-15В: C6.2 C28.2 C32.2 DA1.6 XP3.6 | length 13.3
  Bottom Layer w0.8: C32.2@15.3,42.5 15.304,42.504 15.304,44.513 C28.2 20.817,44.517 C6.2@21.55,45.25 ; C32.2@15.4,42.359 15.4,41.019 15.863,40.556 DA1.6@15.863,40.307 ; XP3.6 21.5,45.3 C6.2@21.55,45.25 ; C6.2@21.6,45.3 C6.2@21.55,45.25
DE: DD1.35 DD3.5 | length 28.3
  Top Layer w0.25: DD3.5 17.724,26.094 18.799,25.019 23.419,25.019 25.195,26.795 33.416,26.795 35.466,24.745 DD1.35
NetC4_1: C4.1 C8.1 DD2.7 | length 5.3
  Top Layer w0.25: DD2.7 36.18,41.405 37.275,42.5 C4.1@37.3,42.5 ; C4.1@37.5,42.5 37.525,42.475 C8.1
NetC9_2: C9.2 DD2.16 R1.1 | length 4.6
  Top Layer w0.25: R1.1 31.575,42.4 R1.1@31.68,42.4 ; DD2.16@31.7,39.9 31.68,39.92 R1.1@31.68,42.4 ; R1.1@31.7,42.475 31.68,42.455 R1.1@31.68,42.4 ; C9.2@33.5,42.4 R1.1@31.68,42.4
NetC10_2: C10.2 DD2.19 R2.1 | length 5
  Top Layer w0.25: C10.2 27.525,42.5 R2.1@29.5,42.5 ; R2.1@29.6,42.475 29.6,41.1 30.17,40.53 30.17,39.735 DD2.19
NetC13_1: C13.1 DD2.20 | length 9.8
  Top Layer w0.25: C13.1 25.089,40.575 30.18,35.484 DD2.20@30.18,34.52
NetC13_2: C13.2 DD2.21 R3.1 | length 12.1
  Top Layer w0.25: C13.2 23.525,42.4 R3.1@25.4,42.4 ; R3.1 25.5,40.8 30.68,35.62 DD2.21@30.68,34.42
NetC14_1: C14.1 DD1.23 ZQ1.2 | length 10.3
  Top Layer w0.25: C14.1 ZQ1.2 28.4,20.6 31.1,23.3 DD1.23@32.4,23.3
NetC15_1: C15.1 DD1.24 ZQ1.1 | length 18.4
  Top Layer w0.25: C15.1 ZQ1.1@28.506,9.406 ; ZQ1.1@28.5,10.4 28.5,11.2 29.818,12.518 29.818,21.382 31.266,22.83 DD1.24
NetC18_2: C18.2 DD1.62 | length 4.8
  Top Layer w0.25: DD1.62 46.905,25.33 48.1,26.525 C18.2@48.1,26.6
NetDD1_10: DD1.10 DD2.38 | length 6.2
  Top Layer w0.25: DD1.10@37.5,28.4 37.5,29.646 39.18,31.326 DD2.38@39.18,33.88
NetDD1_11: DD1.11 DD2.37 | length 6.1
  Top Layer w0.25: DD1.11@37,28.6 37,29.782 38.68,31.462 DD2.37@38.68,33.98
NetDD1_12: DD1.12 DD2.1 | length 12.7
  Top Layer w0.25: DD1.12 36.481,28.265 36.481,28.963 36.501,28.983 36.501,30.238 v1(37.382,31.118) ; DD2.1 39.18,38.542 39.3,38.422 v1@39.3,38.4
  Bottom Layer w0.25: v1(37.382,31.118) 39.3,33.037 v1(39.3,38.3) v1@39.4,38.4
NetDD1_13: DD1.13 DD2.36 | length 6.5
  Top Layer w0.25: DD1.13 35.981,28.265 35.981,28.963 36.001,28.983 36.001,29.12 36.051,29.17 36.051,30.993 38.2,33.142 38.2,33.42 38.19,33.43 38.19,33.79 DD2.36@38.2,33.8
NetDD1_38: DD1.38 R7.2 | length 3.4
  Top Layer w0.25: DD1.38 36.966,13.613 R7.2@37.028,13.551
NetDD2_2: DD2.2 DD2.4 R5.1 | length 5.1
  Top Layer w0.25: DD2.4 37.68,40.88 v1@38.1,41.3 ; v1@38.1,41.127 38.655,40.572 38.655,40.435 38.67,40.42 38.67,39.735 DD2.2
  Bottom Layer w0.25: v1(38.06,41.268) 38.146,41.182 38.146,40.829 38.8,40.175 R5.1@38.8,39.9
NetDD2_10: DD2.10 R4.1 | length 3.2
  Top Layer w0.25: DD2.10@34.7,39.8 34.69,39.81 34.69,40.398 34.7,40.409 34.7,41.675 34.875,41.85 34.875,42.1 35.25,42.475 R4.1
NetDD3_12: DD3.12 R6.1 XP4.2 | length 13.3
  Top Layer w0.25: DD3.12@17.597,17.218 17.724,17.091 17.724,15.192 R6.1 17.572,15.027 XP4.2 17.572,4.128 XP4.2@17.6,4.1
NetDD3_13: DD3.13 R6.2 XP4.1 | length 13.5
  Top Layer w0.25: DD3.13 18.994,16.019 19.202,15.811 19.206,15.811 19.629,15.387 19.629,15.059 19.5,14.93 XP4.1@19.5,4.2
NetHL1_2: HL1.2 R7.1 | length 1.9
  Top Layer w0.25: R7.1 38.81,11.61 HL1.2@38.9,11.7
NetR1_2: R1.2 XP3.1 | length 3.1
  Top Layer w0.25: R1.2@31.4,44.5 31.5,44.6 XP3.1
NetR2_2: R2.2 XP3.2 | length 3.1
  Top Layer w0.25: XP3.2 29.5,44.6 R2.2@29.6,44.5
NetR3_2: R3.2 XP3.3 | length 4.2
  Top Layer w0.25: R3.2 25.75,44.325 26.125,44.7 26.125,44.95 27.5,46.325 27.5,47.4 XP3.3@27.6,47.5
RE: DD1.36 DD3.4 | length 27.6
  Top Layer w0.25: DD3.4 18.994,26.094 19.619,25.469 23.233,25.469 25.009,27.245 33.602,27.245 35.966,24.881 DD1.36
RXD: DD1.27 DD3.3 | length 18.4
  Top Layer w0.25: v1@19.9,28.5 20.264,28.136 DD3.3 ; v1(31.284,21.503) 31.333,21.503 31.506,21.33 DD1.27
  Bottom Layer w0.25: v1(19.786,28.576) 19.786,27.314 25.597,21.503 v1(31.284,21.503)
TCK: DD1.57 XP2.1 | length 12.2
  Top Layer w0.25: DD1.57 45.865,22.83 52.035,29 52.035,29.735 XP2.1@52.6,30.3
TD0: DD1.55 XP2.3 | length 17.1
  Top Layer w0.25: DD1.55 48.106,21.83 50.986,18.95 53.15,18.95 53.735,19.535 53.735,23.996 XP2.3@52.765,24.965
TDI: DD1.54 XP2.9 | length 22.5
  Top Layer w0.25: DD1.54 43.901,21.315 44.599,21.315 44.619,21.295 48.005,21.295 50.8,18.5 55.1,18.5 56.275,19.675 56.275,26.665 55.24,27.7 XP2.9@55.2,27.7
TMS: DD1.56 XP2.5 | length 9.7
  Top Layer w0.25: DD1.56 50.45,22.33 52.6,20.18 XP2.5@52.6,20.1
TXD: DD1.28 DD3.6 | length 21.1
  Top Layer w0.25: DD3.6 16.454,28.454 v1@16.5,28.5 ; v1(31.187,20.582) 31.293,20.582 31.541,20.83 DD1.28
  Bottom Layer w0.25: v1(16.586,28.576) 17.887,28.576 25.882,20.582 30.982,20.582 v1@31.1,20.7
Общ_5В: C4.2 C7.2 C8.2 C9.1 C10.1 C12.1 C14.2 C15.2 C16.2 C17.1 C18.1 C19.2 C20.1 C29.2 C33.2 DA2.5 DD1.22 DD1.53 DD1.63 DD2.3 DD2.6 DD2.8 DD2.11 DD2.17 DD2.18 DD2.28 DD2.29 DD2.31 DD2.32 DD2.33 DD3.2 HL1.1 R4.2 XP2.2 XP2.10 | length 54.8
  Top Layer w0.25: v1(21,30.4) 21,30.278 21.117,30.161 C16.2 ; C16.2@21.153,28.616 21.534,28.235 DD3.2 ; C15.2@24.9,11.3 24.9,16.925 C14.2 ; C10.1 27.75,44.325 28.125,44.7 28.125,44.95 28.3,45.125 v1@28.3,46 ; C17.1 29.825,23.769 C17.1@29.838,23.756 ; C17.1@29.9,23.9 29.97,23.83 DD1.22 32.561,23.815 34.285,23.815 v1(34.3,23.8) ; DD2.18 30.68,38.62 31.1,38.2 31.1,38.3 31.18,38.38 DD2.17 ; C9.1 R4.2 36.5,44.325 v1(36.5,45.6) ; DD2.28 34.182,34.127 34.182,35.3 34.6,35.718 v1(34.6,35.8) 34.68,35.72 DD2.29 ; DD2.11 34.19,39.715 34.19,38.31 v1(34.2,38.3) ; DD2.31 35.68,35.28 v1(36.2,35.8) ; DD2.8 35.69,39.715 35.69,38.815 36.2,38.304 v1(36.2,38.3) 36.286,38.386 36.432,38.386 36.68,38.635 DD2.6 ; R4.2@35.75,44.325 C4.2@37.475,44.325 ; DD2.32 36.18,35.78 v1(36.2,35.8) ; DD2.33 36.68,35.32 v1(36.2,35.8) ; C4.2 39.425,44.325 C8.2@39.5,44.4 ; DD2.3 38.18,38.642 38.4,38.422 v1(38.4,38.3) ; v1(38.9,15.1) 38.9,13.9 HL1.1@39,13.8 ; v1(42.2,21.2) 42.322,21.2 42.692,20.83 45.729,20.83 45.875,20.684 45.875,20.32 45.97,20.225 C20.1@46.05,20.225 ; v1(42.2,25.8) 42.215,25.815 43.871,25.815 DD1.63 45.555,25.83 46.1,26.375 46.1,28.609 C19.2
  other v1: 24.886,13.876 31.124,38.164 28.224,46.064
Общ_15В: C5.2 C6.1 C27.2 C28.1 C31.2 C32.1 DA1.5 XP3.5 | length 25.5
  Bottom Layer w0.8: C31.2 12.588,36.176 12.588,38.237 C27.2 12.68,38.345 12.68,39.621 DA1.5@13.237,40.178 ; DA1.5 DA1.5@13.391,40.41 ; DA1.5@13.333,40.337 DA1.5@13.369,40.374 ; C28.1@13.4,44.6 13.454,44.546 13.454,42.463 C32.1 13.391,42.4 DA1.5@13.391,40.41 ; C6.1@23.4,45.2 C5.2 ; C6.1@23.4,45.5 23.4,45.025 17.533,39.158 14.7,39.158 13.448,40.41 DA1.5@13.391,40.41 ; C6.1@23.5,45.625 XP3.5
Общ_27В: C1.1 C2.2 C3.2 C21.2 C22.2 C23.2 C24.2 C25.2 C26.2 DA1.1 DA2.1 DA3.1 XP1.2 | length 5.2
  Top Layer w0.8: C1.1 1.998,10.502 XP1.2@2.5,10
Общ_RS: C11.1 C30.2 C34.2 DA3.5 DD3.15 XP4.3 | length 4.7
  Top Layer w0.25: C11.1@21.026,15.059 21.534,15.567 DD3.15 21.534,19.466 v1@21.5,19.5
  other v1: 21.4,19.6
pads on no net: DD1.1 DD1.2 DD1.3 DD1.4 DD1.5 DD1.6 DD1.7 DD1.8 DD1.9 DD1.14 DD1.15 DD1.16 DD1.17 DD1.18 DD1.19 DD1.20 DD1.25 DD1.26 DD1.29 DD1.30 DD1.31 DD1.32 DD1.33 DD1.34 DD1.37 DD1.39 DD1.40 DD1.41 DD1.42 DD1.43 DD1.44 DD1.45 DD1.46 DD1.47 DD1.48 DD1.49 DD1.50 DD1.51 DD1.58 DD1.59 DD1.60 DD1.61 DD2.5 DD2.12 DD2.13 DD2.14 DD2.15 DD2.22 DD2.23 DD2.24 DD2.25 DD2.26 DD2.27 DD2.35 DD3.7 DD3.8 DD3.9 DD3.10 DD3.11 DD3.14 XP2. XP2.4 XP2.6 XP2.7 XP2.8

## Polygon pours and split planes (outlines as drawn)
Общ_5В on Bottom Layer "Общ_5В_L02_P006" (solid, pour order 6): 6.1,26.8 5.8,27.1 5.8,34.2 6.8,35.2 14.6,35.2 24.6,45.2 24.6,49.9 59.454,49.9 59.9,49.454 59.9,0.574 59.626,0.3 23.8,0.3 23.8,19.9 20.2,23.5 13.4,23.5 10.2,26.7 10.2,26.8
Общ_RS on Bottom Layer "Общ_RS_L02_P004" (solid, pour order 4): 20.2,23.5 23.8,19.9 23.8,0.3 23.7,0.2 11.6,0.2 11.6,15.4 11.7,15.5 8.1,19.1 5.7,19.1 5.7,26.8 10.2,26.8 13.5,23.5
Общ_27В on Bottom Layer "Общ_27В_L02_P000" (solid, pour order 0): 0,49.5 0.5,50 8.2,50 8.2,36.7 5.7,34.2 5.7,19 8.1,19 11.6,15.5 11.6,0 0,0
+5В on Top Layer "+5В_L01_P005" (solid, remove dead copper, pour order 5): 6.1,26.8 5.8,27.1 5.8,34.2 6.8,35.2 14.6,35.2 24.6,45.2 24.6,49.9 59.454,49.9 59.9,49.454 59.9,0.574 59.626,0.3 23.8,0.3 23.8,19.9 20.2,23.5 13.4,23.5 10.2,26.7 10.2,26.8
+5В_RS on Top Layer "+5В_RS_L01_P003" (solid, pour order 3): 20.2,23.5 23.8,19.9 23.8,0.3 23.7,0.2 11.6,0.2 11.6,15.4 11.7,15.5 8.1,19.1 5.7,19.1 5.7,26.8 10.2,26.8 13.5,23.5
+27В on Top Layer "+27В_L01_P001" (solid, pour order 1): 0,49.5 0.5,50 8.2,50 8.2,36.7 5.7,34.2 5.7,19 8.1,19 11.6,15.5 11.6,0 0,0

## Keep-outs
Top Layer:
  circle w0.5: c57,3 r2.5
  circle w0.5: c57,47 r2.5
  circle w0.5: c3,47 r2.5
  circle w0.5: c3,3 r2.5
Bottom Layer:
  circle w0.5: c57,3 r2.5
  circle w0.5: c57,47 r2.5
  circle w0.5: c3,47 r2.5
  circle w0.5: c3,3 r2.5

## Silkscreen, mask and mechanical layers (free items; w line width, h text height)
Top Overlay:
  circle w0.254: c57,3 r3
Board:
  the board outline again, w0.2

## Text inside footprints (layer, text, board x,y; h text height)
C1: Top Overlay "+" at 1.527,17.396 h1.25